# EAGLE board Receiver (EAGLE 5.00)
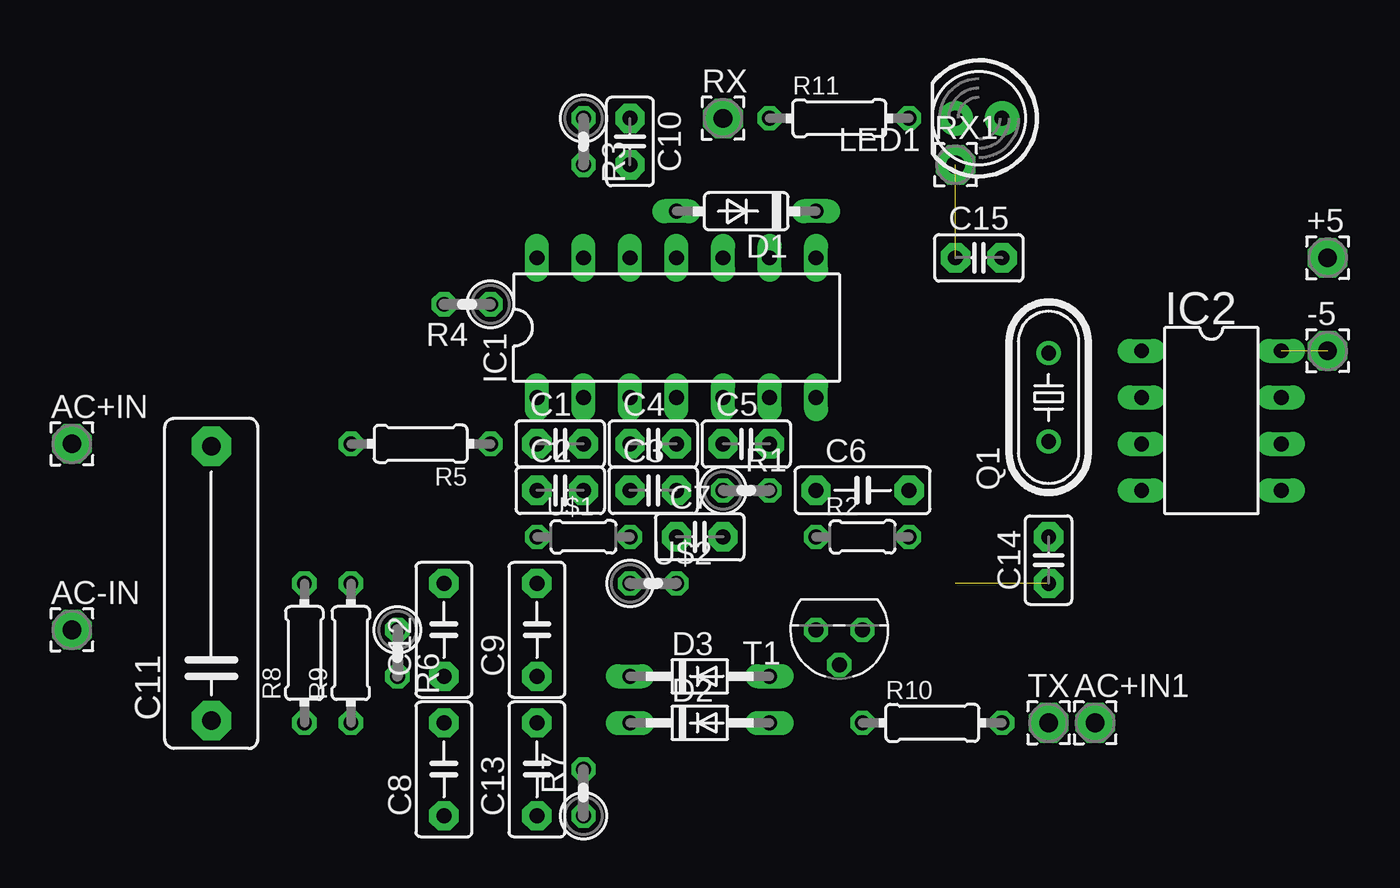
[diagram p0: board, top side]
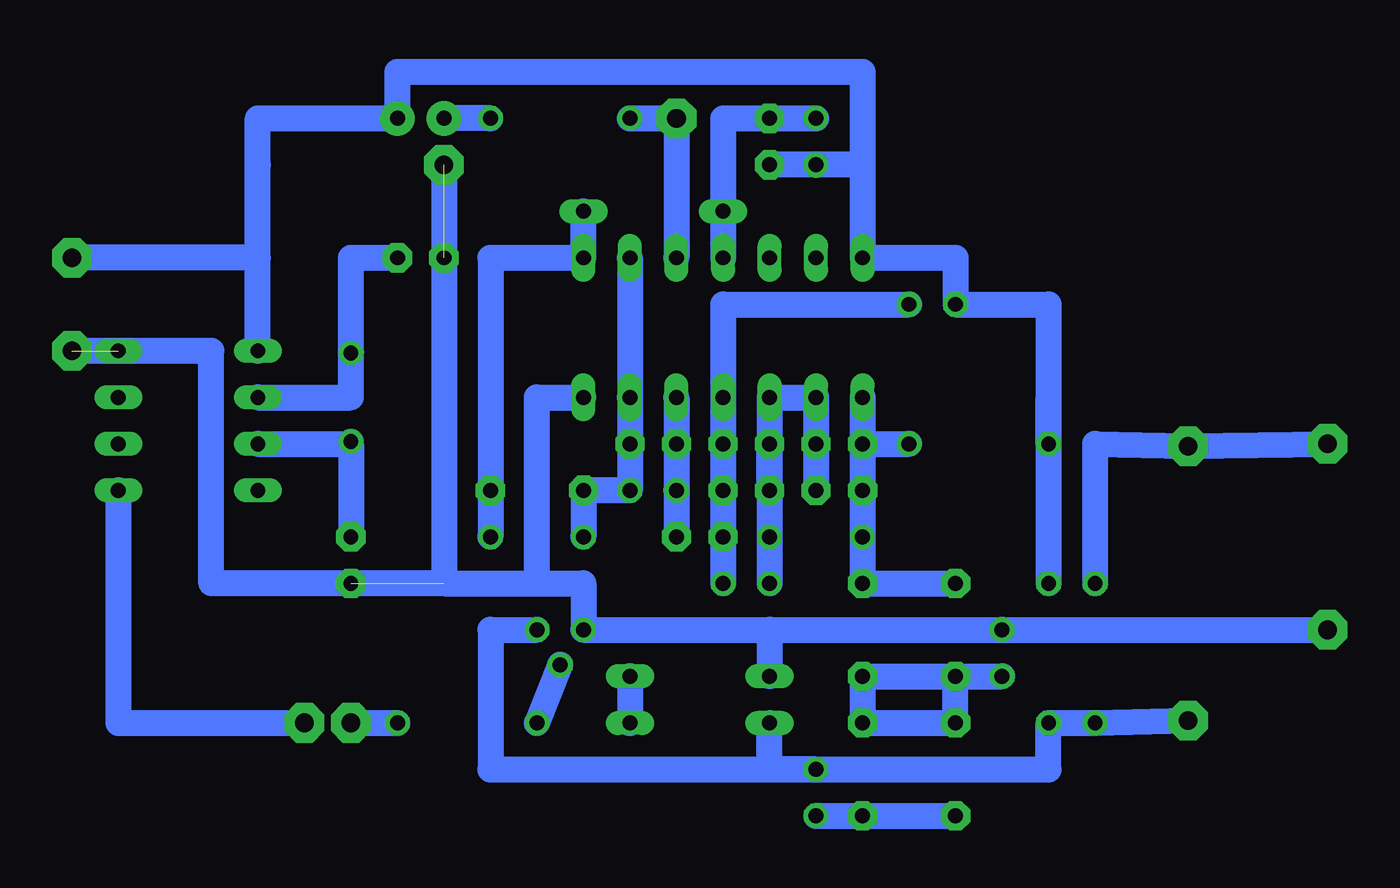
[diagram p1: board, bottom side, seen from below]

No outline drawn. Coordinates in mm, seen from the top.
Copper layers (1*16): Top 0.035mm / dielectric 1.5mm / Bottom 0.035mm
Design rules "default": minimum track width 10mil, minimum drill 24mil, track to track 8mil, track to pad 8mil, pad to pad 8mil, via to via 8mil, smd to smd 8mil, copper to edge 40mil, drill to drill 8mil, minimum pad ring 10mil, minimum via ring 8mil, stop-mask expansion 4mil, vias tented up to drill 0mil, thermal gap 10mil

## Footprints (pad centres in the part's own frame; a part is rotated, then mirrored left to right if it is on the bottom)
2,15/1,0 = drill 1.016 pad 2.159 octagon: 1 0,0
C2.5-2 = drill 0.813 pad 1.6 octagon: 1 -1.27,0; 2 1.27,0
C5B2.5 = drill 0.813 pad 1.6 octagon: 1 -2.54,0; 2 2.54,0
C5B3 = drill 0.813 pad 1.6 octagon: 1 -2.54,0; 2 2.54,0
C15B5 = drill 1.016 pad 2.159 octagon: 1 -7.493,0; 2 7.493,0
DO35-7 = drill 0.813 long: A 3.81,0; C -3.81,0
DO34-7 = drill 0.813 long: A 3.81,0; C -3.81,0
DIL14 = drill 0.813 long: 1 -7.62,-3.81; 2 -5.08,-3.81; 3 -2.54,-3.81; 4 0,-3.81; 5 2.54,-3.81; 6 5.08,-3.81; 7 7.62,-3.81; 8 7.62,3.81; 9 5.08,3.81; 10 2.54,3.81; 11 0,3.81; 12 -2.54,3.81; 13 -5.08,3.81; 14 -7.62,3.81
DIL8 = drill 0.813 long: 1 -3.81,-3.81; 2 -1.27,-3.81; 3 1.27,-3.81; 4 3.81,-3.81; 5 3.81,3.81; 6 1.27,3.81; 7 -1.27,3.81; 8 -3.81,3.81
LED5MM = drill 0.813 pad 1.88 round: A -1.27,0; K 1.27,0
HC49/S = drill 0.813 round: 1 -2.413,0; 2 2.413,0
0207/2V = drill 0.813 octagon: 1 -1.27,0; 2 1.27,0
0204/5 = drill 0.813 octagon: 1 -2.54,0; 2 2.54,0
0204/7 = drill 0.813 octagon: 1 -3.81,0; 2 3.81,0
TO92 = drill 0.813 octagon: 1 1.27,0; 2 0,1.905; 3 -1.27,0

## Placement (x,y rotation side)
+5  [2,15/1,0]  35.56,-15.24 0 top
-5  [2,15/1,0]  35.56,-20.32 0 top
AC+IN  [2,15/1,0]  -33.02,-25.4 0 top
AC+IN1  [2,15/1,0]  22.86,-40.64 0 top
AC-IN  [2,15/1,0]  -33.02,-35.56 0 top
C1  3n3  [C2.5-2]  -6.35,-25.4 0 top
C2  4n7  [C2.5-2]  -6.35,-27.94 0 top
C3  3n3  [C2.5-2]  -1.27,-27.94 0 top
C4  4n7  [C2.5-2]  -1.27,-25.4 0 top
C5  10p  [C2.5-2]  3.81,-25.4 0 top
C6  10p  [C5B2.5]  10.16,-27.94 0 top
C7  100p  [C2.5-2]  1.27,-30.48 0 top
C8  [C5B3]  -12.7,-43.18 90 top
C9  [C5B3]  -7.62,-35.56 90 top
C10  10nF  [C2.5-2]  -2.54,-8.89 270 top
C11  0.1uF VAC x2 roted  [C15B5]  -25.4,-33.02 90 top
C12  [C5B3]  -12.7,-35.56 90 top
C13  [C5B3]  -7.62,-43.18 90 top
C14  [C2.5-2]  20.32,-31.75 90 top
C15  [C2.5-2]  16.51,-15.24 0 top
D1  1N4148DO35-7  [DO35-7]  3.81,-12.7 180 top
D2  BAS15  [DO34-7]  1.27,-40.64 0 top
D3  BAS15  [DO34-7]  1.27,-38.1 0 top
IC1  4069N  [DIL14]  0,-19.05 0 top
IC2  PIC12F629P  [DIL8]  29.21,-24.13 270 top
LED1  [LED5MM]  16.51,-7.62 180 top
Q1  [HC49/S]  20.32,-22.86 90 top
R1  220k  [0207/2V]  3.81,-27.94 0 top
R2  47k  [0204/5]  10.16,-30.48 0 top
R3  100k  [0207/2V]  -5.08,-8.89 270 top
R4  470k  [0207/2V]  -11.43,-17.78 180 top
R5  10M  [0204/7]  -13.97,-25.4 180 top
R6  33k  [0207/2V]  -15.24,-36.83 270 top
R7  10k  [0207/2V]  -5.08,-44.45 90 top
R8  1M  [0204/7]  -20.32,-36.83 90 top
R9  50  [0204/7]  -17.78,-36.83 90 top
R10  200  [0204/7]  13.97,-40.64 0 top
R11  [0204/7]  8.89,-7.62 0 top
RX  [2,15/1,0]  2.54,-7.62 0 top
RX1  [2,15/1,0]  15.24,-10.16 0 top
T1  BC337  [TO92]  8.89,-35.56 180 top
TX  [2,15/1,0]  20.32,-40.64 0 top
U$1  220uH  [0204/5]  -5.08,-30.48 0 top
U$2  220uH  [0207/2V]  -1.27,-33.02 0 top

## Library data of the parts
+5 -5 AC+IN AC+IN1 AC-IN RX RX1 TX = wirepad
C1-C15 = capacitor-wima
D1-D3 = diode
IC1 = 40xx
IC2 = microchip
LED1 = SparkFun
Q1 = crystal
R1 R3-R7 U$1 U$2 = resistor
R2 R8-R11 = rcl
T1 = transistor

## Nets
5V: +5.1 C10.2 IC1.14 IC2.1 LED1.A R3.2 R4.2 R5.2 R9.2
GND: -5.1 AC-IN.1 C14.1 C15.1 D3.C IC1.7 IC2.8 R6.1 RX1.1 T1.1
N$1: C5.2 C6.1 IC1.6 IC1.9 R1.2 R2.1
N$2: C1.2 C2.2 C3.1 C4.1 IC1.2 IC1.3 U$1.2 U$2.1
N$3: C3.2 C4.2 C7.1 IC1.4 R4.1 U$2.2
N$4: C1.1 C2.1 C9.2 C12.2 IC1.1 R5.1 U$1.1
N$5: C5.1 C7.2 IC1.5 R1.1
N$6: C8.2 C9.1 C12.1 C13.2 R6.2
N$7: C6.2 D1.C IC1.8 R2.2
N$8: C10.1 D1.A IC1.11 R3.1
N$9: C8.1 C13.1 R7.1
N$10: R10.1 T1.2
N$11: D2.A D3.A
N$12: AC+IN.1 C11.2 R8.2
N$13: IC1.10 R11.1 RX.1
N$14: C11.1 D2.C R7.2 R8.1 R9.1 T1.3
N$15: AC+IN1.1 IC2.5
N$16: LED1.K R11.2
N$17: R10.2 TX.1
N$18: C15.2 IC2.2 Q1.2
N$19: C14.2 IC2.3 Q1.1

## Tracks (layer width: path | path; a pad name or v marks a point on that pad's centre or on a via)
5V
  Bottom 1.422: R3.2 C10.2 R3.2 | R5.2 -17.78,-17.78 R4.2 -12.7,-15.24 IC1.14 -7.62,-10.16 | +5.1 25.4,-15.24 IC2.1 25.4,-10.16 25.4,-7.62 LED1.A 17.78,-5.08 -7.62,-5.08 -7.62,-10.16 | R5.2 -17.78,-22.86 | R5.2 R9.2 | -7.62,-10.16 R3.2
GND  (3 unrouted)
  Bottom 1.422: -2.54,-35.56 D3.C | -2.54,-35.56 R6.1 AC-IN.1 | -2.54,-35.56 T1.1 7.62,-33.02 10.16,-33.02 | 15.24,-33.02 27.94,-33.02 27.94,-20.32 -5.1 | 15.24,-33.02 10.16,-33.02 | IC1.7 10.16,-22.86 10.16,-33.02 | RX1.1 15.24,-33.02
N$1
  Bottom 1.422: C6.1 R1.2 C5.2 IC1.6 IC1.9 | C6.1 R2.1 C6.1
N$2
  Bottom 1.422: C2.2 C1.2 IC1.2 IC1.3 C3.1 | C3.1 C4.1 | C3.1 U$1.2 U$2.1
N$3
  Bottom 1.422: U$2.2 C7.1 C3.2 C4.2 IC1.4 0,-17.78 R4.1
N$4
  Bottom 1.422: C1.1 R5.1 | C1.1 C2.1 U$1.1 C9.2 C12.2 | IC1.1 C1.1
N$5
  Bottom 1.422: IC1.5 C5.1 R1.1 C7.2
N$6
  Bottom 1.422: C12.1 C8.2 C13.2 C9.1 R6.2
N$7
  Bottom 1.422: D1.C IC1.8 12.7,-15.24 C6.2 R2.2
N$8
  Bottom 1.422: R3.1 C10.1 0,-7.62 D1.A IC1.11
N$9
  Bottom 1.422: C8.1 C13.1 R7.1
N$10
  Bottom 1.422: T1.2 R10.1
N$11
  Bottom 1.422: D3.A D2.A
N$12
  Bottom 1.422: AC+IN.1 C11.2 -20.32,-25.4 R8.2
N$13
  Bottom 1.422: IC1.10 RX.1 R11.1
N$14
  Bottom 1.422: C11.1 R8.1 R9.1 -17.78,-43.18 R7.2 | D2.C -2.54,-43.18 R7.2 | R7.2 12.7,-43.18 12.7,-35.56 T1.3
N$15
  Bottom 1.422: AC+IN1.1 33.02,-40.64 IC2.5
N$16
  Bottom 1.422: R11.2 LED1.K
N$17
  Bottom 1.422: TX.1 R10.2
N$18
  Bottom 1.422: C15.2 20.32,-15.24 20.32,-20.32 | 20.32,-20.32 Q1.2 | IC2.2 20.32,-22.86 20.32,-20.32
N$19
  Bottom 1.422: 20.32,-25.4 C14.2 | 20.32,-25.4 Q1.1 | IC2.3 20.32,-25.4